# Altium PCB PCB1.PcbDoc
Units mil, origin at the board's own origin, x right, y up, seen from the top; angles counter-clockwise.
Board outline 2755 x 3780 mil, 2 copper layers (Top Layer, Bottom Layer); 103 components, 89 nets, 427 pads, 120 vias.
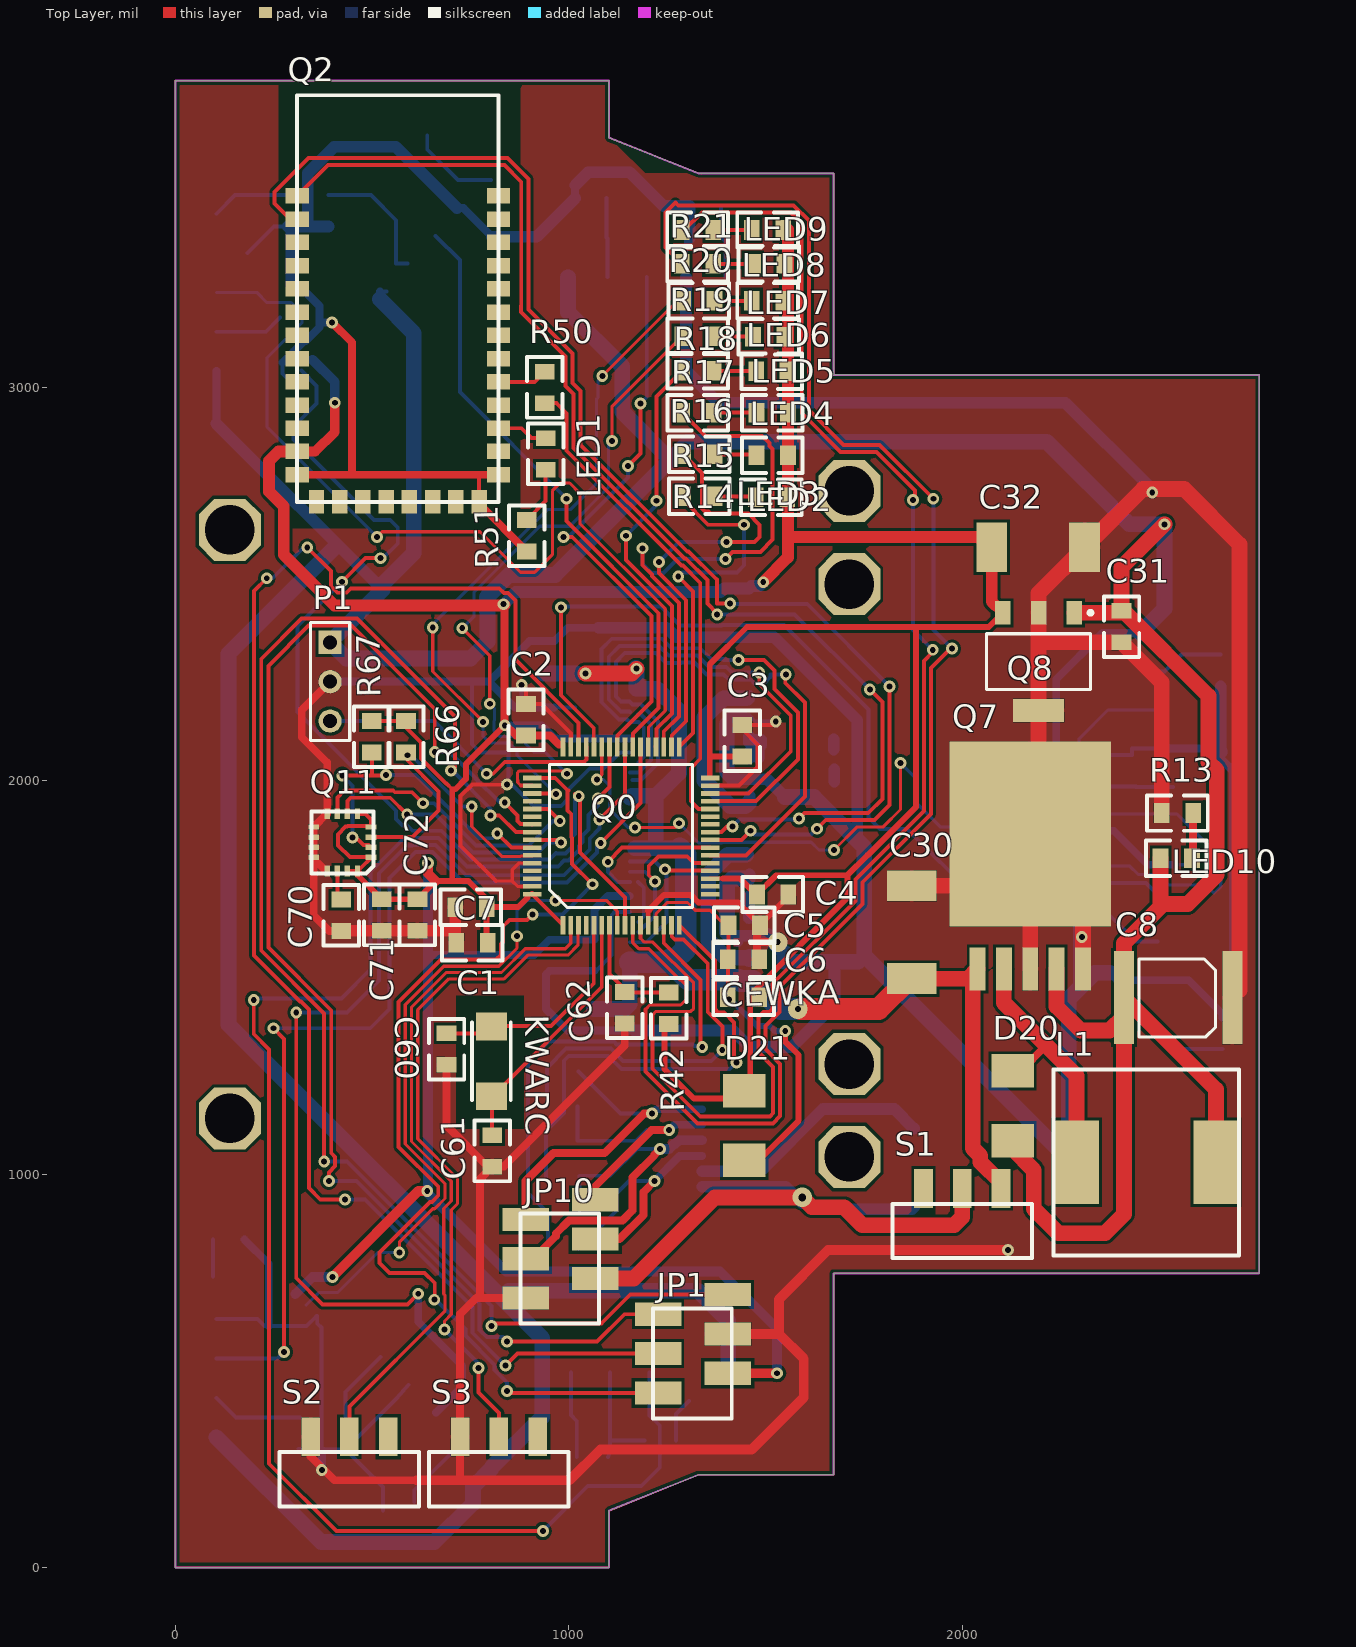
[diagram p0: Top Layer view]
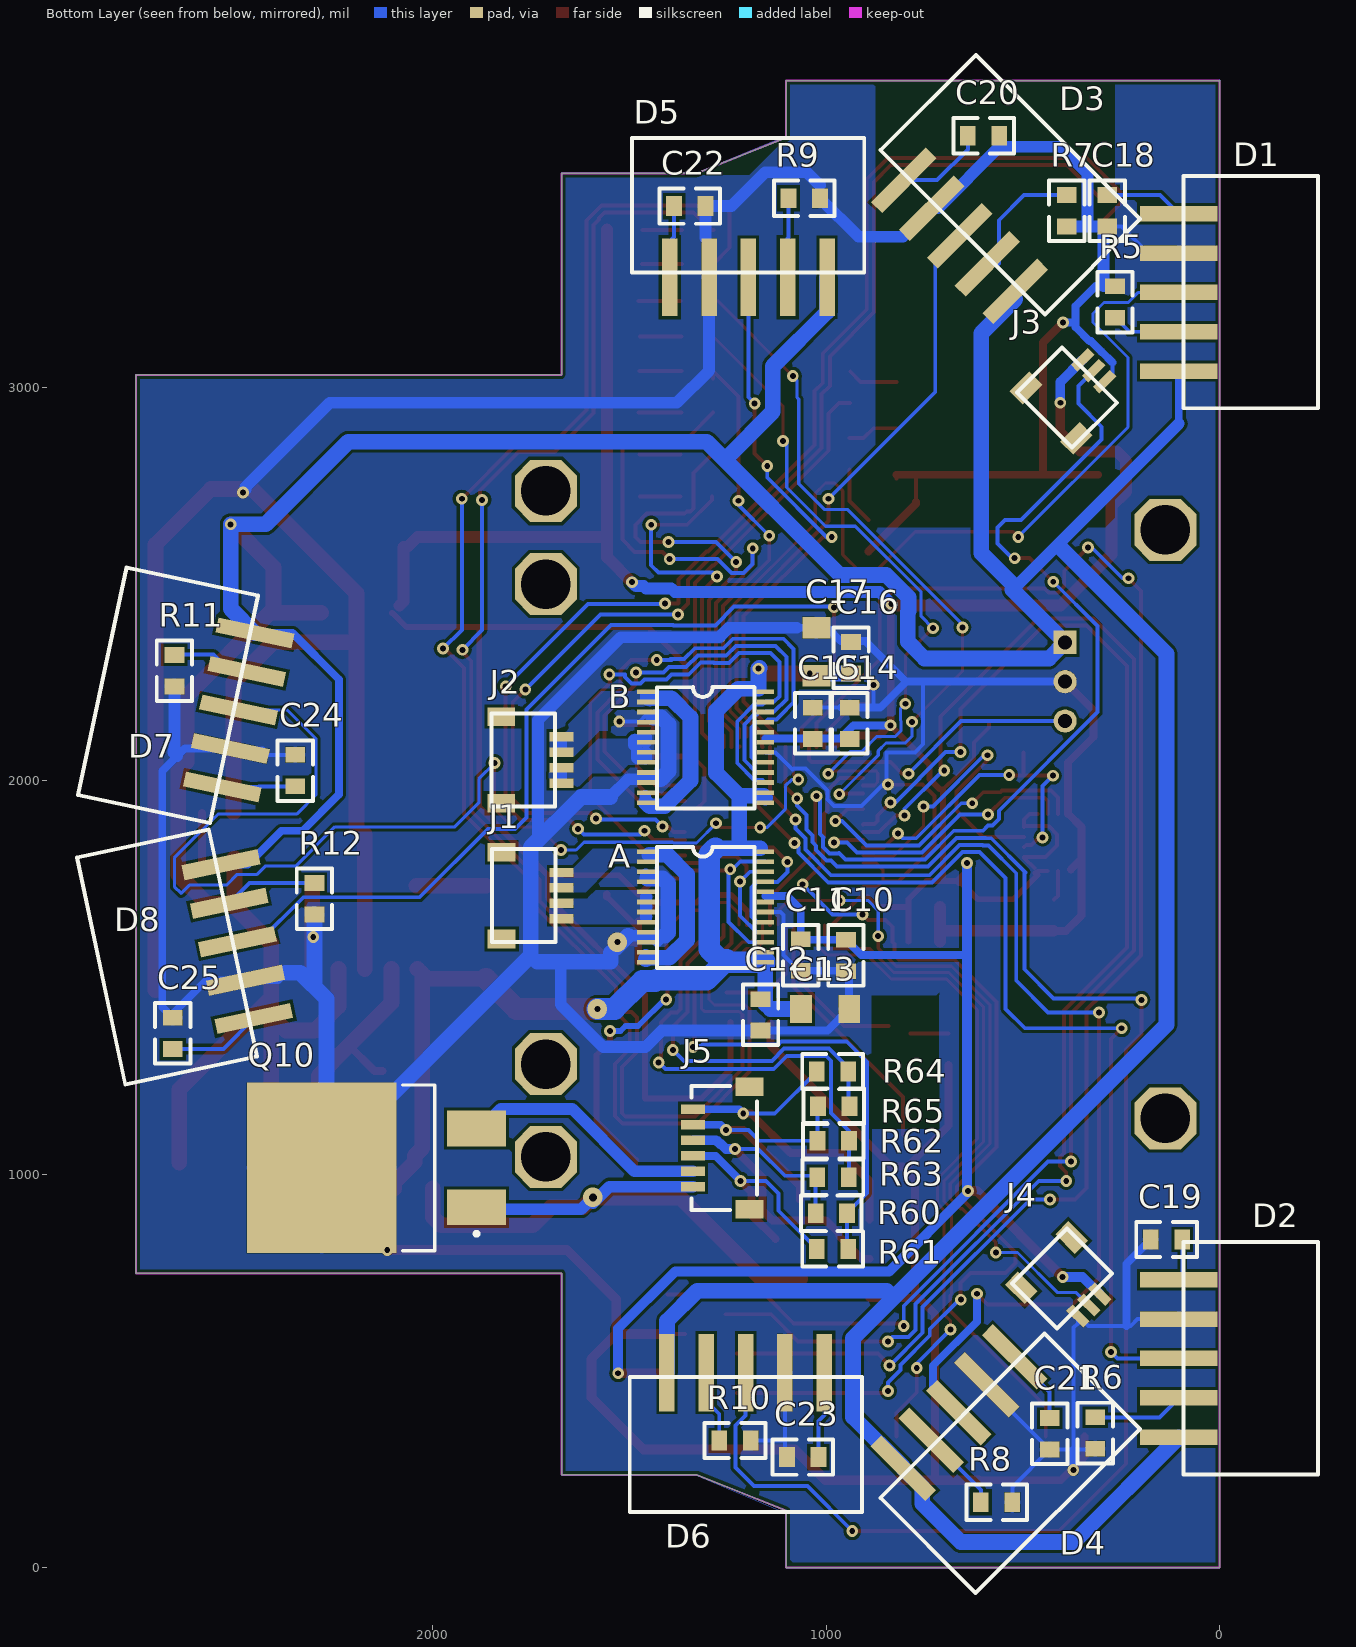
[diagram p1: Bottom Layer view, seen from below]
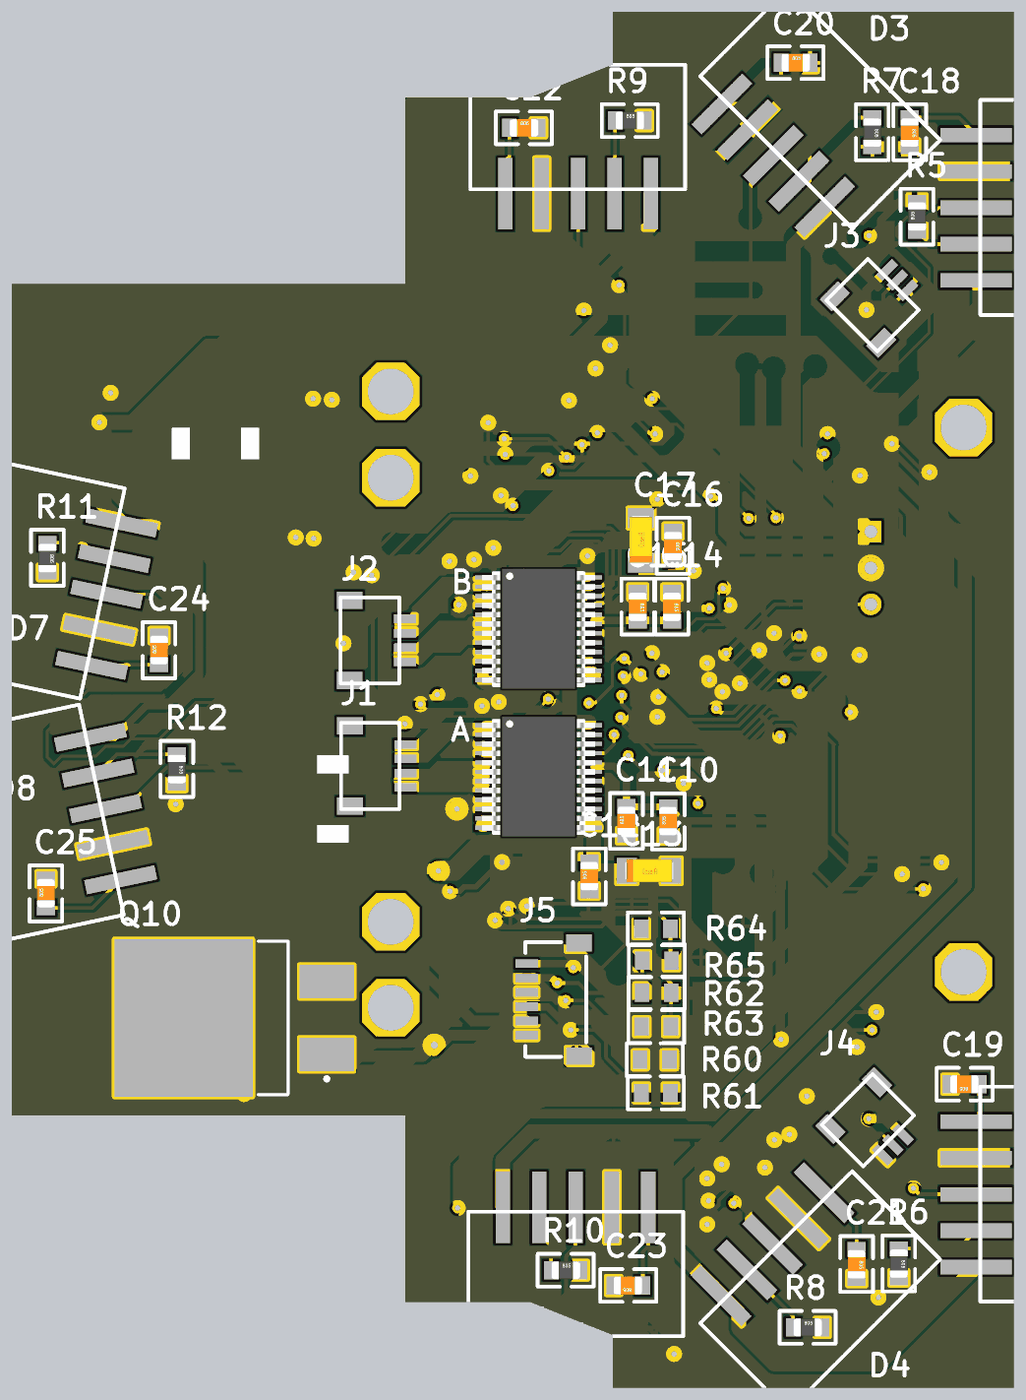
[diagram p2: 3D render of the assembled board from below, using the file's embedded part models]

## Layer stack, top to bottom
Top Layer: signal copper 1.4
Dielectric: dielectric 12.6, FR-4, Dk 4.8
Bottom Layer: signal copper 1.4

## Board outline
0,0 0,3780 1102,3780 1102,3635 1330,3544 1673,3544 1673,3032 2755,3032 2755,748 1673,748 1673,236 1330,236 1102,145 1102,0

## Design rules (kind name [scope] priority, off if disabled: settings)
Clearance Clearance_1 [All] p1: gap=8
Clearance [InNet('GND')] p2: gap=20
ComponentClearance [All] p1 off: gap=10 collisioncheckmode=3 verticalgap=10 showdistances=FALSE
PolygonConnect PolygonConnect_1 [InNet('5V')AND InNet('GND')] p1: connectstyle=Relief reliefconductorwidth=10 reliefentries=4 polygonreliefangle="90 Angle" airgapwidth=10
PolygonConnect [All vs (InNet('M_OUT1A') AND InNet('M_OUT1B') AND InNet('M_OUT2A') AND InNet('M_OUT2B'))] p2: connectstyle=Direct reliefconductorwidth=10 reliefentries=4 polygonreliefangle="90 Angle" airgapwidth=10
RoomDefinition Sheet1 [InComponentClass('Sheet1')] p1: confinementstyle=ConfineIn formatcopy=TRUE lockcomponents=FALSE outline -500,-281 4429,-281 4429,3984 -500,3984
RoutingVias [All] p1: holewidth=20 width=50 viastyle="Through Hole" minholewidth=28 minwidth=50 maxholewidth=30 maxwidth=70
SilkscreenOverComponentPads SilkToSolderMaskClearance [IsPad] p1: minsilkscreentomaskgap=10
SolderMaskExpansion [All] p1: expansion=7
Width [All] p1: maxlimit=70 minlimit=8 preferedwidth=10
26 further rules are at their usual default settings.

## Components (designator, comment, footprint, x,y, rotation, side; value= is the part's Value field where it differs from the comment)
A "TB6612" SSOP24 1458,1820 r180 bottom
B "TB6612" SSOP24 1458,2226 r180 bottom
C1 "100n" "0805 CAP" 794,1588 r90 top
C2 "100n" "0805 CAP" 891,2115 r0 top
C3 "100n" "0805 CAP" 1441,2062 r0 top
C4 "100n" "0805 CAP" 1478,1711 r270 top
C5 "100n" "0805 CAP" 1406,1633 r270 top
C6 "1u" "0805 CAP" 1484,1546 r90 top
C7 "10u" "0805 CAP" 791,1679 r90 top
C8 "1000u" F720J108MMC 2545,1449 r0 top
C10 "10u" "0805 CAP" 950,1596 r0 bottom
C11 "100n" "0805 CAP" 1065,1597 r0 bottom
C12 "100n" "0805 CAP" 1167,1445 r0 bottom
C13 "22u" TANTAL_A 1064,1420 r180 bottom
C14 "10u" "0805 CAP" 940,2106 r180 bottom
C15 "100n" "0805 CAP" 1034,2106 r180 bottom
C16 "100n" "0805 CAP" 937,2273 r180 bottom
C17 "22u" TANTAL_A 1025,2267 r90 bottom
C18 "100n" "0805 CAP" 286,3409 r180 bottom
C19 "100n" "0805 CAP" 175,834 r270 bottom
C20 "100n" "0805 CAP" 560,3640 r90 bottom
C21 "100n" "0805 CAP" 432,300 r180 bottom
C22 "100n" "0805 CAP" 1307,3461 r90 bottom
C23 "100n" "0805 CAP" 1100,281 r270 bottom
C24 "100n" "0805 CAP" 2350,2066 r0 bottom
C25 "100n" "0805 CAP" 2661,1398 r0 bottom
C30 "100u" TANTAL_C 1872,1497 r90 top
C31 "470n" "0805 CAP" 2405,2352 r0 top
C32 "33u" TANTAL_C 2075,2594 r0 top
C60 "18p" "0805 CAP" 689,1278 r0 top
C61 "18p" "0805 CAP" 805,1099 r180 top
C62 "100n" "0805 CAP" 1142,1463 r180 top
C70 "10n" 0805 421,1618 r0 top
C71 "10u" 0805 524,1699 r180 top
C72 "100n" 0805 615,1699 r180 top
CEWKA "10uH" 0805 1404,1450 r270 top
D1 "GP2Y" "gp2y smd" 92,3537.55 r270 bottom
D2 "GP2Y" "gp2y smd" 92,827.55 r270 bottom
D3 "GP2Y" "gp2y smd" 862,3603 r225 bottom
D4 "GP2Y" "gp2y smd" 445,595 r315 bottom
D5 "GP2Y" "gp2y smd" 1494,3292 r180 bottom
D6 "GP2Y" "gp2y smd" 909,484 r0 bottom
D7 "GP2Y" "gp2y smd" 2567,1893 r102 bottom
D8 "GP2Y" "gp2y smd" 2447,1299 r78 bottom
D20 "Schottky" SMB 2128,1164 r90 top
D21 "Schottky" SMB 1446,1114 r90 top
J1 "4PIN_1MM" CON_1mm_4pin 1771,1716 r270 bottom
J2 "4PIN_1MM" CON_1mm_4pin 1772,2061 r270 bottom
J3 "3PIN_1MM" CON_1MM_3PIN 376,2959 r225 bottom
J4 "3PIN_1MM" CON_1MM_3PIN 416,723 r315 bottom
J5 "6PIN_1MM" 6pin 1274,1047 r90 bottom
JP1 "HEADER 3X2" "MM3X2 SMD" 1404,494 r90 top
JP10 "HEADER 3X2" "MM3X2 SMD" 1067,735 r90 top
KWARC "16MHz" KWARC_16M 803,1277 r90 top
L1 "100uH" CEWKA 2881,1030 r90 top
LED1 "LED_0805" 0805 941,2791 r0 top
LED2 "LED_0805" 0805 1475,2721 r270 top
LED3 "LED_0805" 0805 1477,2828 r270 top
LED4 "LED_0805" 0805 1477,2936 r270 top
LED5 "LED_0805" 0805 1476,3041 r270 top
LED6 "LED_0805" 0805 1468,3129 r270 top
LED7 "LED_0805" 0805 1465,3220 r270 top
LED8 "LED_0805" 0805 1468,3314 r270 top
LED9 "LED_0805" 0805 1465,3400 r270 top
LED10 "LED_0805" 0805 2584,1803 r90 top
P1 "Header 3" HDR1X3 393,2352 r270 top
Q0 "STM32F303RCT6" STM32F303RCT6 1008,1736 r90 top
Q2 "HC-06" PCBComponent_1 575,3221 r0 top
Q7 "LM2576" LM2576 2039,1325 r0 top
Q8 "LM3940IMP" LM3940IMP 2194,2303 r270 top
Q10 "N-MOSFET" DPAK 2137,1016 r0 bottom
Q11 "GYRO_L3GD20" GYRO_L3GD20 438,1922 r180 top
R5 "1" "0805 RES" 266,3257 r0 bottom
R6 "1" "0805 RES" 316,302 r180 bottom
R7 "1" "0805 RES" 389,3409 r180 bottom
R8 "1" "0805 RES" 527,166 r90 bottom
R9 "1" "0805 RES" 1016,3481 r90 bottom
R10 "1" "0805 RES" 1192,323 r90 bottom
R11 "1" "0805 RES" 2657,2240 r180 bottom
R12 "1" "0805 RES" 2301,1660 r180 bottom
R13 "470" "0805 RES" 2507,1918 r270 top
R14 "680" "0805 RES" 1291,2723 r270 top
R15 "680" "0805 RES" 1291,2830 r270 top
R16 "680" "0805 RES" 1288,2936 r270 top
R17 "680" "0805 RES" 1288,3042 r270 top
R18 "680" "0805 RES" 1288,3130 r270 top
R19 "680" "0805 RES" 1290,3220 r270 top
R20 "680" "0805 RES" 1287,3314 r270 top
R21 "680" "0805 RES" 1287,3400 r270 top
R42 "10k" 0805 1254,1462 r180 top
R50 "470" "0805 RES" 939,2960 r0 top
R51 "470" "0805 RES" 893,2583 r0 top
R60 "680" 0805 947,901 r90 bottom
R61 "680" 0805 1024,810 r270 bottom
R62 "680" 0805 942,1085 r90 bottom
R63 "680" 0805 1023,992 r270 bottom
R64 "680" 0805 944,1261 r90 bottom
R65 "680" 0805 1021,1173 r270 bottom
R66 "10k" 0805 586,2152 r180 top
R67 "10k" 0805 499,2152 r180 top
S1 "Switch" Switch 2000,885 r180 top
S2 "Switch" Switch 442,254 r180 top
S3 "Switch" Switch 822,254 r180 top

## Footprints (in the part's own frame and the unit in brackets; to place one, negate y for a bottom-side part, rotate by r counter-clockwise, add the part's x,y. Pads: shape width x height; smd on the part's side, far side on the other; paste and mask are expansions set on the pad)
6pin [mm] "con_1mm_mm"
  rect 0.6x1.55 smd: 1(-2,1.65) 2(-1,1.65) 3(0,1.65) 4(1,1.65) 5(2,1.65) 6(3,1.65)
  rect 1.2x1.8 smd: NC(-3.45,-2) NC(4.45,-2)
  silkscreen extent -3.5,-2.5 4.5,1.75
0805 [mil]
  rect 50x40 smd: 1(0,0) 2(0,80)
  silkscreen extent -45,-37 45,117
"0805 CAP" [mil]
  rect 50x40 smd: 1(0,0) 2(0,80)
  silkscreen extent -45,-37 45,117, body extent -25,0 25,79, height 31
"0805 RES" [mil]
  rect 50x40 smd: 1(0,0) 2(0,80)
  silkscreen extent -45,-37 45,117, body extent -25,0 25,79, height 31
CEWKA [mm]
  rect 5.4x2.9 smd: 1(0,15) 2(0,6)
  silkscreen extent -6,4.5 6,16.5
CON_1MM_3PIN [mm]
  rect 0.6x1.55 smd: 1(-1.5,2.5) 2(-0.5,2.5) 3(0.5,2.5)
  rect 1.2x1.8 smd: NC(-2.8,-1.375) NC(1.8,-1.375)
  silkscreen extent -3,-2 2.03,2.1
CON_1mm_4pin [mm]
  rect 0.6x1.55 smd: 1(-1.3,2.5) 2(-0.3,2.5) 3(0.7,2.5) 4(1.7,2.5)
  rect 1.2x1.8 smd: NC(-2.6,-1.375) NC(3,-1.375)
  silkscreen extent -2.8,-2 3.2,2.1
DPAK [mm]
  rect 3.81x2.32 smd: 1(-6.3,2.54) 3(-6.3,-2.54)
  rect 9.65x11 smd: 4(3.7,0)
  silkscreen extent -6.42,-5.35 -1.53,5.35, body extent -3.6,-5.33 6.05,5.33, height 4.83
F720J108MMC [mm]
  rect 1.3x6 smd: 1(-3.404,0) 2(3.6,0)
  silkscreen extent -2.44,-2.54 2.51,2.5
"gp2y smd" [mm]
  rect 1x5 smd: 1(2.438,-0.3) 2(4.978,-0.3) 3(7.518,-0.3) 4(10.058,-0.3) 5(12.598,-0.3)
  silkscreen extent 0,0 15,8.7
GYRO_L3GD20 [mm]
  rect 0.7x0.35 smd: 1(-1.5,2.95) 2(-1.5,2.3) 3(-1.5,1.65) 4(-1.5,1) 9(2.2,1) 10(2.2,1.65) 11(2.2,2.3) 12(2.2,2.95)
  rect 0.35x0.7 smd: 5(-0.625,0.15) 6(0.025,0.15) 7(0.675,0.15) 8(1.325,0.15) 13(1.325,3.85) 14(0.675,3.85) 15(0.025,3.85) 16(-0.625,3.85)
  silkscreen extent -1.65,0 2.35,4
HDR1X3 [mm] "Connector; Header; 3 Position"
  rect 1.5x1.5 hole 0.9: 1(0,0)
  round 1.5 hole 0.9: 2(2.54,0) 3(5.08,0)
  silkscreen extent -1.27,-1.27 6.35,1.27
KWARC_16M [mm] "Kwarc_16MHz"
  rect 1.8x2 smd: 1(-2,0) 2(2.5,0)
  silkscreen extent -2.25,-1.25 2.75,1.25
LM2576 [mil]
  rect 40x110 smd: 1(0,196.85) 2(66.93,196.85) 3(133.86,196.85) 4(200.79,196.85) 5(267.72,196.85)
  rect 410x470 smd: 3(133.86,539.37)
LM3940IMP [mm] "LM3940IMIP"
  rect 1.5x1 smd: GND(-3.15,0) IN(-3.15,2.3) OUT(-3.15,-2.3)
  rect 1.5x3.3 smd: GND(3.15,0)
  silkscreen extent -3.27,-3.35 1.8,3.48, body extent -1.85,-3.35 1.86,3.35, height 1.6
"MM3X2 SMD" [mm]
  rect 1.5x3 smd: 1(0,0) 2(-1.27,4.5) 3(2.54,0) 4(1.27,4.5) 5(5.08,0) 6(3.81,4.5)
  silkscreen extent -2.92,-0.25 4.19,4.83, body extent -2.87,-1.16 6.68,5.74, height 5.2
PCBComponent_1 [mm]
  rect 1.5x1 smd: 3(-6.75,3.75) 3V3(-6.75,-9.75) 4(-6.75,2.25) 5(-6.75,0.75) 6(-6.75,-0.75) 7(-6.75,-2.25) 8(-6.75,-3.75) 9(-6.75,-5.25) 10(-6.75,-6.75) 11(-6.75,-8.25) 23(6.25,-9.75) 25(6.25,-6.75) 27(6.25,-3.75) 28(6.25,-2.25) 29(6.25,-0.75) 30(6.25,0.75) 31(6.25,2.25) 32(6.25,3.75) 33(6.25,5.25) 34(6.25,6.75) GND(-6.75,-11.25) GND(6.25,-11.25) KEY(6.25,-5.25) LED(6.25,-8.25) UART_RXD(-6.75,5.25) UART_TXD(-6.75,6.75)
  rect 1x1.5 smd: 14(-5.5,-13) 15(-4,-13) 16(-2.5,-13) 17(-1,-13) 18(0.5,-13) 19(2,-13) 20(3.5,-13) GND(5,-13)
  silkscreen extent -6.75,-13 6.25,13.25
SMB [mil]
  rect 85x107.99 smd: 1(-78.74,0) 2(98.43,0)
SSOP24 [mm]
  rect 1.143x0.3 smd: 1(0,0) 2(0,-0.65) 3(0,-1.3) 4(0,-1.95) 5(0,-2.6) 6(0,-3.25) 7(0,-3.9) 8(0,-4.55) 9(0,-5.2) 10(0,-5.85) 11(0,-6.5) 12(0,-7.15) 13(7.7,-7.15) 14(7.7,-6.5) 15(7.7,-5.85) 16(7.7,-5.2) 17(7.7,-4.55) 18(7.7,-3.9) 19(7.7,-3.25) 20(7.7,-2.6) 21(7.7,-1.95) 22(7.7,-1.3) 23(7.7,-0.65) 24(7.7,0)
  silkscreen extent 0.7,-7.52 7,0.3, body extent -0.1,-7.89 7.8,0.74, height 1.88
STM32F303RCT6 [mm]
  rect 0.3x1.2 smd: BOOT0(1.39,2.579) PA3(-0.61,-8.921) PA4(0.89,-8.921) PA5(1.39,-8.921) PA6(1.89,-8.921) PA7(2.39,-8.921) PA14(6.89,2.579) PA15(6.39,2.579) PB0(3.89,-8.921) PB1(4.39,-8.921) PB2(4.89,-8.921) PB3(3.89,2.579) PB4(3.39,2.579) PB5(2.89,2.579) PB6(2.39,2.579) PB7(1.89,2.579) PB8(0.89,2.579) PB9(0.39,2.579) PB10(5.39,-8.921) PB11(5.89,-8.921) PC4(2.89,-8.921) PC5(3.39,-8.921) PC10(5.89,2.579) PC11(5.39,2.579) PC12(4.89,2.579) PD2(4.39,2.579) PF4(-0.11,-8.921) VDD_1(-0.61,2.579) VDD_2(6.89,-8.921) VDD_4(0.39,-8.921) VSS_1(-0.11,2.579) VSS_2(6.39,-8.921)
  rect 1.2x0.3 smd: NRST(-2.61,-2.421) PA0(-2.61,-5.921) PA1(-2.61,-6.421) PA2(-2.61,-6.921) PA8(8.89,-2.921) PA9(8.89,-2.421) PA10(8.89,-1.921) PA11(8.89,-1.421) PA12(8.89,-0.921) PA13(8.89,-0.421) PB12(8.89,-6.921) PB13(8.89,-6.421) PB14(8.89,-5.921) PB15(8.89,-5.421) PC0(-2.61,-2.921) PC1(-2.61,-3.421) PC2(-2.61,-3.921) PC3(-2.61,-4.421) PC6(8.89,-4.921) PC7(8.89,-4.421) PC8(8.89,-3.921) PC9(8.89,-3.421) PC13(-2.61,0.079) PC14/OSC32_IN(-2.61,-0.421) PC15/OSC32_OUT(-2.61,-0.921) PF0/OSC_IN(-2.61,-1.421) PF1/OSC_OUT(-2.61,-1.921) VBAT(-2.61,0.579) VDD_3(8.89,0.579) VDDA(-2.61,-5.421) VSS_3(8.89,0.079) VSSA/VREF-(-2.61,-4.921)
  silkscreen extent -1.47,-7.79 7.76,1.44, body extent -1.57,-7.89 7.86,1.54, height 1.6
Switch [mm]
  rect 1.2x2.5 smd: 1(-2.5,-2) 2(0,-2) 3(2.5,-2)
  silkscreen extent -4.5,-1 4.5,2.5
TANTAL_A [mm]
  rect 1.4x1.8 smd: 1(0,0) 2(3.1,0)
  body extent -0.12,-0.79 3.27,0.81, height 2.05
TANTAL_C [mm]
  rect 2x3.2 smd: 1(0,0) 2(6,0)
  body extent -0.04,-1.6 6.14,1.6, height 2.22

## Part data
C1 C2 C3 C4 C5 C6 C7 C10 C11 C12 C14 C15 C16 C18 C19 C20 C21 C22 C23 C24 C25 C31 C60 C61 C62 C70 C71 C72: library part CAP, "Capacitor"
C8: "F720J108MMC"
C13 C17: library part E
C30 C32: library part ELECTRO2, "Electrolytic Capacitor"
CEWKA R5 R6 R7 R8 R9 R10 R11 R12 R13 R14 R15 R16 R17 R18 R19 R20 R21 R42 R50 R51 R60 R61 R62 R63 R64 R65 R66 R67: library part R
J1 J2: library part CON_1MM_4PIN
J3 J4: library part CON_1MM_3PIN
J5 JP1: library part CON_1MM_6PIN
KWARC: library part XTAL, "Crystal Oscillator"
L1: library part CEWKA
P1: "Header, 3-Pin"
Q2: library part Component_1, "Bluetooth"
Q10: library part n-mosfet

## Free pads (board coordinates)
  oct 157.48x157.48 hole 125.98: 1(138,1142) 1(138,2638) 1(1713,1044) 1(1713,1280) 1(1713,2500) 1(1713,2737)

## Via types
v1: diameter 30, hole 15, Top Layer to Bottom Layer, 117 vias
v2: diameter 50, hole 15, Top Layer to Bottom Layer, 2 vias
v3: diameter 50, hole 20, Top Layer to Bottom Layer, 1 vias

## Nets (pads, with @x,y where several pads share a name; then routed paths per layer and width w, separated by ;. In a path a pad name is that pad's centre, name@x,y a point inside that pad or via, vN(x,y) a via of type N, cw(c..) or ccw(c..) an arc to the next point about the centre after c; other vN are vias at no path point)
5V: C8.1 C31.2 D1.5 D2.5 D3.5 D4.5 D5.5 D6.5 D7.5 D8.5 D20.1 L1.2 LED10.2 P1.1 Q7.4 Q8.IN | length 14124.5
  Top Layer w40: D20.1 2128,1064 2182,1010 2182,912 2244,850 2363,850 2411,898 C8.1@2411,1402 ; Q7.4 2239.79,1426.21 2301,1365 2374,1365 C8.1@2411,1402 ; Q8.IN C31.2@2400.02,2427.02 ; LED10.2 2504,1680 2411,1587 C8.1 ; 2511,1687 2573,1687 2647,1761 2647,2027 2626,2048 2626,2215.6 2409.6,2432 C31.2 2405,2543 v1(2514,2652) ; L1.2 2644.78,1215.22 C8.1 ; C8.1@2411,1402 C8.1
  Bottom Layer w10: D3.5 D3.5@536.08,3243.92 ; D8.5 D8.5@2577.29,1786.62
  Bottom Layer w20: 103.81,2908.19 D1.5 ; D3.5@519.63,3224.37 D3.5 ; D7.5 2356.71,2375.71 2239,2258 2239,1965 2331,1873 2385,1873 2471.38,1786.62 D8.5
  Bottom Layer w30: 103.81,2908.19 526.5,2485.5
  Bottom Layer w40: D2.5 370.36,65 658,65 756,163 756,204.55 D4.5 804.08,255.08 932,383 932,583 135,1380 135,2323 400,2588 ; D3.5@519.63,3224.37 606,3138 606,2579 526.5,2499.5 ; 526.5,2485.5 P1.1 434,2311 750,2311 793.09,2354.09 793.09,2429.09 791,2431.19 791,2466.81 847.19,2523 965,2523 1304,2862 2215,2862 2425,2652 v1(2514,2652) 2514,2437.38 D7.5 ; 847,704 1328,704 1405,627 D6.5 ; D5.5 998,3192 1136,3054 1136,2938 1252,2822
BAT1: J5.3 JP10.3 R61.1 | length 623.9
  Top Layer w20: 1128.6,835 1190,896.4 1190,955 v1(1218,983)
  Bottom Layer w10: R61.1 1121,907 1121,951 1153,983 v1(1218,983)
  Bottom Layer w20: v1(1218,983) 1281,1046 1337.96,1046 J5.3
BAT1_ADC: Q0.PA0 R60.1 R61.2 | length 1316.8
  Top Layer w8: Q0.PA0@1239.33,1631.47 Q0.PA0
  Top Layer w10: Q0.PA0 1241.11,1587.89 1335,1494 1335,1327 v1(1339,1323)
  Bottom Layer w10: R61.2@947,813 R60.1 896,952 896,1285 948,1337 1114.46,1337 1121.46,1330 1315,1330 1319,1326 1336,1326 v1(1339,1323)
BAT2: J5.4 JP10.4 R60.2 R63.1 | length 956.5
  Top Layer w20: JP10.4 909.76,785 966.89,842.13 966.89,848.93 1000.49,882.53 1136.53,882.53 1162,908 1162,992.35 1218,1048.35 1218,1050 v1(1232,1064)
  Bottom Layer w10: R60.2 1027,996 1105,996 1173,1064 v1(1232,1064)
  Bottom Layer w25: v1(1232,1064) 1255,1064 1267.5,1076.5 1269.7,1076.5 1279.57,1086.37 J5.4
BAT2_ADC: Q0.PA2 R62.1 R63.2 | length 1197.3
  Top Layer w10: Q0.PA2 1371,1542.72 1371,1419.62 1379.62,1411 1395,1411 1420,1386 1420,1290 v1(1426,1284)
  Bottom Layer w10: R63.2@942,993 R62.1 942,1110 988,1156 988,1288.38 1000.62,1301 1099.54,1301 1133.54,1267 1409,1267 v1(1426,1284)
BAT3: J5.5 JP10.5 R62.2 R65.1 | length 702.1
  Top Layer w20: JP10.5 1067,969 1210,1112 v1(1255,1112)
  Bottom Layer w10: R65.1@1022,1172 R62.2 1171,1085 1198,1112 v1(1255,1112)
  Bottom Layer w20: v1(1255,1112) 1268.74,1125.74 J5.5
BAT3_ADC: Q0.PA1 R64.1 R65.2 | length 968.6
  Top Layer w10: Q0.PA1 1261.57,1632.47 1261.57,1604.24 1269.19,1596.62 1291.65,1596.62 1353,1535.27 1353,1412.16 1390,1375.16 v1(1390,1316)
  Bottom Layer w10: R65.2@944,1176 R64.1 944,1269.84 993.16,1319 1107,1319 1138,1288 1362,1288 v1(1390,1316)
BAT4: J5.6 JP10.6 R64.2 | length 853.8
  Top Layer w20: JP10.6 889.83,982.83 961,1054 1091,1054 1191,1154 v1(1211,1154)
  Bottom Layer w10: R64.2 1131,1154 v1(1211,1154) 1222.11,1165.11
  Bottom Layer w20: 1222.11,1165.11 J5.6
GND: A.3 A.4 A.9 A.10 A.18 B.3 B.4 B.9 B.10 B.18 C1.2 C2.2 C3.2 C4.2 C5.2 C6.1 C7.2 C8.2 C10.2 C11.2 C12.2 C13.2 C14.2 C15.2 C16.2 C17.2 C18.1 C19.1 C20.1 C21.1 C22.1 C23.1 C24.1 C25.1 C30.2 C31.1 C32.2 C60.1 C61.2 C62.2 C70.1 C71.2 C72.2 D1.2 D2.2 D3.2 D4.2 D5.2 D6.2 D7.2 D8.2 J3.3 J4.3 JP1.3 JP10.2 P1.2 Q0.BOOT0 Q0.VSS_1 Q0.VSS_2 Q0.VSS_3 Q0.VSSA/VREF- Q2.GND Q7.3 Q7.5 Q8.GND Q10.4 Q11.8 Q11.9 Q11.10 Q11.11 Q11.12 Q11.13 R5.1 R6.1 R7.1 R8.1 R9.1 R10.1 R11.1 R12.1 R13.1 R51.1 S2.3 S3.3 | length 26686.9
  Top Layer w8: 815,1745 856,1745 ; Q0.VSS_1 869.33,1731.67 856,1745 ; Q0.BOOT0 872.72,1790.72 856,1774 856,1745
  Top Layer w10: Q2.GND@771.85,2709.19 771.85,2774.24 ; 815,1745 725,1835 725,1961 755,1991 778.4,1991 779.4,1990 842,1990 v1(843,1991) ; Q2.GND@821.06,2768.21 Q2.GND@821.06,2778.09 ; v1(880,2244) 891,2233 C2.2 930,2195 1004.89,2120.11 Q0.VSS_3 Q0.VSS_3@1005.67,2085.22 ; Q0.VSSA/VREF-@1201.64,1633.34 1201.64,1669.64 ; Q0.VSS_2@1358.44,1988.35 Q0.VSS_2 1432.57,1987.57 1481,2036 1481,2091 1441,2131 C3.2 1517,2142 v1(1526,2151) ; JP1.3@1359,594 JP1.3 ; C8.2@2686.73,1446 C8.2 C8.2@2702,1464.27
  Top Layer w15: 1201.64,1669.64 1242,1710 1309.76,1710 1329.18,1690.58 1429.42,1690.58 C5.2@1478,1642 ; C5.2@1478,1626 C4.2@1558,1706
  Top Layer w20: Q2.GND@309.25,2778.09 449,2778.09 ; S2.3 343.57,282.43 404,222 612.83,222 ; 378,1775 Q11.12@351.39,1801.61 ; P1.2 321,2180 321,2111 385.83,2046.17 Q11.8 384.85,1916.09 Q11.9 Q11.10 Q11.11 Q11.12 Q11.12@351.39,1801.61 ; v1(398,3165) 449,3114 449,2778.09 ; C70.1 391,1618 351.39,1657.61 Q11.12@351.39,1801.61 ; C60.1 689,1124 794,1019 C61.2 774,988 774,693 766,685 JP10.2 ; 723,235 723.57,235.57 S3.3 723.57,644.57 765,686 ; Q2.GND@771.85,2709.19 771.85,2704.15 R51.1 ; C61.2@806,1020 835,1020 1142,1327 C62.2 ; Q2.GND@821.06,2778.09 449,2778.09 ; C6.1@1478,1540 1478,1590 ; C5.2@1478,1642 1478,1590 ; v2(1531,1590) 1478,1590 ; C4.2@1558,1706 C4.2
  Top Layer w25: 612.83,222 1002,222 1080,300 1465,300 1597,432 1597,531 1534,594 ; JP1.3 1534,594 ; v1(2116,807) 1659,807 1534,682 1534,594
  Top Layer w30: C70.1@422,1619 C71.2 C72.2 703,1619 ; C1.2@711,1591 C7.2
  Top Layer w40: C30.2@1865,1733.22 Q7.3@2041.71,1733.22 ; Q7.3@2172.86,1521.85 Q7.3@2172.86,1864.37 ; Q7.3@2194,1885.51 2194,2178.98 2194,2350 ; Q7.5 Q7.3@2306.72,1730.51 ; R13.1@2507,1920 2507,2250 C31.1 2196,2352 2194,2350 ; C8.2@2705,1467.27 2705,2601 2564,2742 2459.22,2742 C32.2 2194,2476.78 2194,2427.02 2194,2350
  Bottom Layer w10: D2.2 208.45,631.55 226,614 237,614 333.52,614 359,639.48 J4.3 360.32,620.68 371,610 371,300 ; D1.2@182.55,3341.55 250,3409 C18.1 ; 272.4,3063.2 272.4,3034.77 J3.3 ; R6.1 312,302 314,300 371,300 ; R8.1@527,145 R8.1 527,205 C21.1 ; D4.2 562,430 C21.1 ; 754,2252 754,2093 774.54,2072.46 847,2072.46 ; v1(843,1991) 847,1995 847,2072.46 ; 880,2188 v1(880,2244) ; C14.2@962,2186 1015,2186 C15.2@1016,2187 ; C11.2@1069,1517 1109,1557 1109,1659 1116.46,1666.46 A.18 ; C23.1 1105,299 D6.2 ; 1108,323 R10.1 ; B.18 1129.46,2072.46 1085.3,2028.3 1082.6,2031 1053,2031 997,1975 997,1952.4 980.6,1936 910,1936 847,1999 847,2072.46 ; D5.2 1298,3371 1307,3380 ; 1458,2166.82 1473.82,2151 v1(1526,2151) ; C24.1 2432,2066 2432,2082.26 D7.2 ; 371,300 C21.1
  Bottom Layer w20: C19.1 237,772 237,614 ; 272.4,3063.2 299.64,3090.44 300.24,3090.44 300.24,3091.04 327.48,3118.28 331.28,3118.28 366,3153 366,3165 ; C18.1 C18.1@295,3400 ; 295,3258 315,3258 366,3207 366,3165 ; v1(372,248) 372,299 ; P1.2 754,2252 797,2252 ; v1(398,3165) 366,3165 ; D3.2@715.94,3456.06 D3.2 804.81,3383 ; C14.2@962,2186 863,2186 797,2252 ; R9.1 1016,3514 ; C11.2 951,1517 C10.2 941.95,1507.95 C13.2 996.95,1365 C12.2 ; 1075,2389.05 997.05,2389.05 963,2355 900,2355 797,2252 ; 2375,1512 2393.83,1493.17 D8.2 2575.83,1493.17 2661,1408 C25.1 2688,1425 2688,2025 2650,2063 2630.74,2082.26 D7.2
  Bottom Layer w30: C18.1 336,3409 ; 295,3258 C18.1@295,3400 ; R7.1 336,3409 ; D3.2@715.94,3456.06 560,3612 403,3612 336,3545 336,3409 ; 804.81,3383 918,3383 R9.1 ; 1016,3514 1049,3547 1155,3547 1241,3461 C22.1 1307,3380 ; 1075,2389.05 1248.35,2389.05 1272.4,2365 1522,2365 1733,2154 1733,1849 1751,1831 ; C12.2 1418,1365 1460,1323 1567,1323 1675,1431 1675,1540 ; D5.2 1298,3043 1380,2961 2262,2961 2476,2747 v1@2476,2740 ; 1411,1606 1416,1606 ; 1421,2004 1504,2004 1549,1959 ; 1429,1593 1416,1606 ; A.4@1454.32,1746.54 1459,1751.23 1459,1761.82 ; 1504,1606 1416,1606 ; Q10.4@2270.67,1016 Q10.4@2270.67,1036.33 ; 2650,2063 2659,2072 2659,2076 2657,2078 R11.1
  Bottom Layer w40: 1411,1606 1402,1615 1402,1738 1415.54,1751.54 1454.32,1751.54 ; 1421,2004 1401,2024 1401,2143 1419.82,2161.82 1437.18,2161.82 1439,2160 ; 1504,1606 v2@1534,1576 ; 1548,1562 1548,1540 1675,1540 1735,1540 ; 1549,1959 1623,1959 1751,1831 1751,1556 Q10.4@2270.67,1036.33 ; Q10.4@2270.67,1016 2270.67,1445.67 2337,1512 2375,1512 ; 2301,1480 R12.1
  other v1: 2304,1603 2483,2733
GYRO_DRDY: Q0.PB5 Q11.6 | length 723.5
  Top Layer w10: Q11.6 437.02,1949.02 445,1957 546,1957 v1(589,1914) ; Q0.PB5 907.24,1849 974,1849 v1(980,1843)
  Bottom Layer w10: v1(589,1914) 660.42,1914 756.42,1818 922,1818 947,1843 v1(980,1843)
GYRO_INT1: Q0.PC12 Q11.7 | length 780.6
  Top Layer w10: Q11.7 411.43,1957.43 429,1975 553.46,1975 557.46,1971 601,1971 v1(629,1943) ; Q0.PC12 946.48,1928.52 v1(977,1898)
  Bottom Layer w10: v1(629,1943) 656.88,1943 763.88,1836 898,1836 960,1898 v1(977,1898)
IN1A: A.17 A.21 Q0.PA7 | length 481.3
  Top Layer w10: v1(1099,1794) 1135.09,1830.09 Q0.PA7
  Bottom Layer w10: v1(1099,1794) 1099,1768 1123.77,1743.23 A.21 ; A.21@1176.05,1743.23 1190.35,1728.93 1190.35,1654.82 A.17@1176.4,1640.87
IN1B: B.17 B.21 Q0.PB10 | length 1368.8
  Top Layer w10: Q0.PB10 1476.2,1948.2 1582,2054 1582,2174 1523,2233 1523,2280 1496,2307 v1(1431,2307)
  Bottom Layer w10: B.17@1176.87,2046.87 1190.35,2060.35 1190.35,2135.65 1176.77,2149.23 B.21 1148.16,2155.91 1126.97,2155.91 1119.35,2163.53 1119.35,2163.66 1083.35,2199.66 1083.35,2335.35 1109.05,2361.05 1236.76,2361.05 1260.8,2337 1334,2337 1361.9,2309.1 1395.52,2309.1 1393.42,2307 v1(1431,2307)
IN2A: A.16 A.22 Q0.PA5 | length 439.9
  Top Layer w10: v1(1219,1743.7) 1219,1744 1203,1760 1203,1783 1228,1808 1301,1808 1318.28,1790.72 Q0.PA5
  Bottom Layer w10: A.22 1193.88,1768.82 v1(1219,1743.7) 1219,1657 A.16@1177.28,1615.28
IN2B: B.16 B.22 Q0.PB11 | length 1280.4
  Top Layer w10: Q0.PB11 1456.89,1967.89 1564,2075 1564,2166.54 1484,2246.54 v1(1484,2275)
  Bottom Layer w10: B.16 1177.28,2021.28 1208.35,2052.35 1208.35,2143.11 1183.32,2168.13 1176,2168.13 ; B.22 1153.94,2175.73 1132.74,2175.73 1101.35,2207.12 1101.35,2315.35 1129.05,2343.05 1229.3,2343.05 1254.35,2318 1277.66,2318 1278.66,2319 1326.54,2319 1356.54,2289 1400,2289 1414,2275 v1(1484,2275)
JTCK: JP1.2 Q0.PA14 | length 2679.3
  Top Layer w10: v1@659,684 659,723 633,749 544,749 519,774 519,801 647,929 651.6,929 668,945.4 668,968.6 567,1069.6 567,1438 674.62,1545.62 815,1545.62 827,1557.62 827,1585 832,1590 832,1629 849,1646 894,1646 v1(908,1660) ; v1(843,449) 848,444 JP1.2 ; Q0.PA14 965.34,2007.26 997.14,1975.46 999,1975.46 997,1973.46 997,1925 1006,1916 1006,1856.6 1008,1854.6 1008,1789 v1(1060,1737)
  Bottom Layer w10: v1@670,673 737,606 737,589.49 811,515.49 811,502.4 843,470.4 v1(843,449) ; v1(908,1660) 984,1660 1024,1700 1024,1701 v1(1060,1737)
  other v1: 658,681
JTMS: JP1.4 Q0.PA13 | length 3940.7
  Top Layer w10: v1(232,2515) 200,2483 200,1556 317,1439 318.6,1439 339,1418.6 339,965 368,936 v1(431,936) ; v1(335,2593) 395,2533 395,2494.4 411.4,2478 434.6,2478 445.6,2489 823,2489 835,2477 845.6,2477 864,2458.6 864,2308 1024.58,2147.42 Q0.PA13 ; v1(839,514) 869,544 JP1.4
  Bottom Layer w10: v1(232,2515) 247,2515 v1@334,2602 ; v1(431,936) 481.42,936 755,662.42 755,596.95 837.95,514 v1(839,514)
KEY: Q0.PB2 R50.1 | length 1261.9
  Top Layer w10: R50.1 968,2960 994,2934 994,2839 1286,2547 1289.6,2547 1334,2502.6 1334,2056 1310,2032 1310,1948 1329.48,1928.52 Q0.PB2
KTIR1: J3.2 Q0.PC1 | length 2579.7
  Top Layer w10: v1(423,2506) 483,2566 v1(521,2566) ; v1@1016,1967 1028,1955 1028,1818 1142.69,1703.31 Q0.PC1
  Bottom Layer w10: J3.2 358.84,3004 358.84,2958.84 300,2900 300,2868 505,2663 546,2663 565,2644 565,2603 528,2566 v1(521,2566) ; v1(423,2506) 310,2393 310,2174.86 561,1923.86 561,1902.4 577.4,1886 589,1886 602,1873 675.97,1873 748.97,1800 951,1800 967.2,1816.2 968.4,1815 991.6,1815 1008,1831.4 1008,1854.6 1006.8,1855.8 1016,1865 v1@1016,1967
  other v1: 1025,1961
KTIR2: J4.2 Q0.PC0 | length 1765.5
  Top Layer w8: v1(569,801) 569,826.96 654.04,912 658.64,912 685,938.36 685,975.64 584,1076.64 584,1430.96 681.66,1528.62 822.04,1528.62 868,1574.57 v1(868,1605) ; v1(966,1696) 1095,1696 1123,1668 Q0.PC0
  Bottom Layer w8: J4.2 364.16,699 412,699 514,801 v1(569,801) ; v1(868,1605) 868,1670 894,1696 v1(966,1696)
LED1: Q0.PB12 R14.1 | length 934.5
  Top Layer w10: v1(1278,2519) 1316,2481 1316,2121.52 Q0.PB12 ; R14.1 1291,2714.16 1354.16,2651 v1(1445,2651)
  Bottom Layer w10: v1(1278,2519) 1289,2530 1427,2530 1445,2548 v1(1445,2651)
LED2: Q0.PB13 R15.1 | length 1148.4
  Top Layer w10: v1(1229,2556) 1229,2527.95 1298,2458.95 1298,2151.43 1261.57,2115.01 1261.57,2086.78 Q0.PB13 ; R15.1 1338,2783 1338,2692.62 1345.62,2685 1354.46,2685 1360.46,2679 1456.6,2679 1485,2650.6 1485,2620 1472,2607 v1(1401,2607)
  Bottom Layer w10: v1(1229,2556) 1280,2607 v1(1401,2607)
LED3: Q0.PB14 R16.1 | length 1478.2
  Top Layer w10: v1(1187,2591) 1187,2548 1211,2524 1211,2520.5 1280,2451.5 1280,2164 1241.11,2125.11 Q0.PB14 ; R16.1 1347,2877 1491.38,2877 1510,2858.38 1510,2851 1518,2843 1518,2613 1487,2582 1416,2582 v1(1398,2564)
  Bottom Layer w10: v1(1187,2591) 1187,2551 1210,2528 1240.6,2528 1276.6,2564 v1(1398,2564)
LED4: Q0.PB15 R17.1 | length 1077.3
  Top Layer w10: v1(1145,2623) 1145,2561.04 1262,2444.04 1262,2171.46 1222.2,2131.66 1222.2,2110 ; Q0.PB15@1220.65,2086.78 Q0.PB15 ; v1(1223,2712) 1223,2977 R17.1 R17.1@1288,3022
  Bottom Layer w10: v1(1145,2623) 1223,2701 v1(1223,2712)
LED5: Q0.PA15 R18.1 | length 1745.4
  Top Layer w8: v1(729,2388) 799,2318 v1(799,2196) ; 878.24,1987.57 870,1995.81 870,2002.18 869,2003.18 869,2020 874.17,2025.17 v1@995,2025.17 ; v1(1110,2864) 1110,2952 R18.1
  Top Layer w10: 878.24,1987.57 Q0.PA15
  Bottom Layer w8: v1(729,2388) 759,2418 759,2480.07 925.93,2647 1001.96,2647 1100.48,2745.52 1100.48,2866.52 1103,2864 v1(1110,2864) ; v1(799,2196) 811,2184 811,2153.18 810,2152.18 810,2127 824,2113 871.03,2113 910.03,2074 939,2074 v1(995,2018)
LED6: Q0.PC10 R19.1 | length 1763.1
  Top Layer w8: v1(654,2390) 654,2278 v1(782,2150) ; v1(1085,3029) R19.1@1276,3220
  Top Layer w10: Q0.PC10 957.89,1967.89 v1@961,1971
  Bottom Layer w8: v1(654,2390) 654,2397.69 946.31,2690 1005.18,2690 1070,2754.82 1070,2970 1074,2974 1074,3018 v1(1085,3029) ; v1(782,2150) 782,2113 799,2096 848,2096 868,2076 868,2065 v1@969,1964
  other v1: 967,1966
LED7: Q0.PC2 R20.1 | length 4173.4
  Top Layer w8: Q0.PC2 1162.37,1588.63 1178,1573 1203,1573 1282,1494 1283.97,1494 1298,1479.97 1298,1444.03 1283.97,1430 1206,1430 1195,1419
  Top Layer w10: 1195,1419 1195,1260.55 1326.55,1129 1518.46,1129 1537,1147.54 1537,1280.46 1499.5,1317.96 1499.5,1376.66 1535,1412.16 1535,1475.55 1746.5,1687.05 1746.5,1742.04 1920.5,1916.04 1920.5,2286.5 1970,2336 v1(1974,2336) ; R20.1 1246,3355 1246,3445 1271,3470 1278,3463 1570.84,3463 1610,3423.84 1610,2942.46 1698.46,2854 1789.46,2854 v1(1926.46,2717)
  Bottom Layer w10: v1(1926.46,2717) 1926.46,2383.54 v1(1974,2336)
LED8: Q0.PC3 R21.1 | length 3877.9
  Top Layer w8: 1182.06,1599.94 1192,1590 1213.54,1590 1317,1486.54 1317,1421 1310,1414 1221.62,1414 1213,1405.38
  Top Layer w10: 1182.06,1599.94 Q0.PC3 ; 1213,1405.38 1213,1268.01 1334.01,1147 1511,1147 1519,1155 1519,1273 1481.5,1310.5 1481.5,1398.5 1495,1412 1509.38,1412 1517,1419.62 1517,1483.01 1728.5,1694.51 1728.5,1749.5 1902.5,1923.5 1902.5,2304.5 1925,2327 v1(1925,2333) ; R21.1 1293,3400 1338,3445 1563.38,3445 1578,3430.38 1578,3427 1592,3413 1592,2935 1691,2836 1782,2836 1880,2738 v1@1880,2722
  Bottom Layer w10: v1(1875,2714) 1875,2383 v1(1925,2333)
M_OUT1A: A.1 A.2 A.11 A.12 J1.1 J1.2 | length 432
  Bottom Layer w10: 1450,1812 1459,1803
  Bottom Layer w30: 1459,1546.5 1459,1557
  Bottom Layer w40: 1450,1812 1404,1812 1354,1762 1354,1595 1399,1550 1454.9,1550 1458.4,1546.5 1459,1546.5
M_OUT1B: B.1 B.2 B.11 B.12 J2.1 J2.2 | length 471.9
  Bottom Layer w30: 1458,2209 1458,2216 ; 1460,1954 1460,1962 ; J2.2@1673.57,2079.81 J2.1@1673.57,2105.43
  Bottom Layer w40: 1451.82,2209.82 1393.82,2209.82 1345,2161 1345,2001 1411,1935 1448.5,1935 B.12
M_OUT2A: A.5 A.6 A.7 A.8 J1.3 J1.4 | length 55
  Bottom Layer w30: 1458,1651 A.7 A.6 1458,1706
M_OUT2B: B.5 B.6 B.7 B.8 J2.3 J2.4 | length 143.4
  Bottom Layer w30: 1458,2057 B.7 ; 1458,2113 B.6 1464.39,2104.43 1488.68,2104.43 1488.68,2090.68 1482,2084 1482,2058 ; J2.4@1674.57,1998 J2.3@1674.57,2028.44
NetC5_1: C5.1 C6.2 CEWKA.1 D21.1 Q0.VDDA | length 1017.3
  Top Layer w8: Q0.VDDA 1221.43,1661.85 1250.08,1690.5 1301.68,1690.5 1321.1,1671.08 1358.92,1671.08 1397,1633 C5.1@1397,1625
  Top Layer w10: C6.2@1397,1540 C6.2@1398,1540 ; C5.1@1397,1625 C5.1@1398,1626 ; CEWKA.1 C6.2 ; C6.2@1406,1548 C5.1 ; D21.1@1484,1015.26 D21.1@1484,1036
  Top Layer w15: D21.1@1484,1036 1584,1136 1584,1303 1550,1337 v1(1550,1364)
  Bottom Layer w15: v1(1407,1444) 1407,1448 1478.5,1376.5 1510.5,1376.5 1523,1364 v1(1550,1364)
NetC18_2: C18.2 D1.1 | length 201.8
  Bottom Layer w10: D1.1 151.26,3489 C18.2
NetC19_2: C19.2 D2.1 | length 93.6
  Bottom Layer w10: D2.1@95,740.36 C19.2
NetC20_2: C20.2 D3.1 | length 229.9
  Bottom Layer w10: C20.2 640,3605 718.23,3526.77 D3.1
NetC21_2: C21.2 D4.1 | length 192.4
  Bottom Layer w10: C21.2 432,446.24 D4.1
NetC22_2: C22.2 D5.1 | length 185.4
  Bottom Layer w10: C22.2 1387,3382 1398,3371 D5.1
NetC23_2: C23.2 D6.1 | length 221
  Bottom Layer w10: D6.1 1005,388 1020,373 C23.2
NetC24_2: C24.2 D7.1 | length 187
  Bottom Layer w10: C24.2 2442,1986 2442,1984.45 D7.1
NetC25_2: C25.2 D8.1 | length 237.6
  Bottom Layer w10: D8.1 2532.76,1318 C25.2
NetC60_2: C60.2 KWARC.2 Q0.PF0/OSC_IN | length 512.1
  Top Layer w10: C60.2 KWARC.2@785.57,1358 ; KWARC.2@841.1,1376.43 954.43,1376.43 1063.17,1485.17 1063.17,1632.46 Q0.PF0/OSC_IN
NetC61_1: C61.1 KWARC.1 Q0.PF1/OSC_OUT | length 645.8
  Top Layer w10: C61.1 KWARC.1@805,1196.26 ; KWARC.1@807,1199.26 1083.63,1475.89 Q0.PF1/OSC_OUT
NetC70_2: C70.2 Q11.14 | length 76.4
  Top Layer w10: Q11.14 411.43,1707.57 C70.2
NetD1_2: D1.4 R5.2 | length 177.3
  Bottom Layer w10: D1.4 229.55,3141.55 R5.2@266,3178
NetD2_2: D2.4 R6.2 | length 232.7
  Bottom Layer w10: D2.4 153.36,382 R6.2
NetD3_2: D3.4 R7.2 | length 338.2
  Bottom Layer w10: R7.2 497,3489 561,3425 561,3314.63 D3.4
NetD4_2: D4.4 R8.2 | length 209.7
  Bottom Layer w10: R8.2 607,196.97 D4.4
NetD5_2: D5.4 R9.2 | length 201.6
  Bottom Layer w10: R9.2 1096,3381 1098,3379 D5.4
NetD6_2: D6.4 R10.2 | length 113.7
  Bottom Layer w10: R10.2 1272,390 D6.4@1305,423
NetD7_2: D7.4 R11.2 | length 200.7
  Bottom Layer w10: D7.4 2513.89,2277.89 2557,2321 R11.2@2656,2321
NetD8_2: D8.4 R12.2 | length 238
  Bottom Layer w10: R12.2 2466.58,1740 D8.4
NetD20_2: D20.2 L1.1 Q7.2 | length 681.2
  Top Layer w20: D20.2 2148.43,1262.43 2213.5,1327.5
  Top Layer w40: Q7.2 2105.43,1521.35 2105.43,1435.57 2213.5,1327.5 2290.45,1250.55 L1.1
NetJ5_1: J5.1 JP10.1 Q10.1 S1.2 | length 1714.2
  Top Layer w40: JP10.1 1165,735 1371,941 v3(1593.31,941) 1618.31,916 1700,916 1746,870 1979,870 2000,891 S1.2
  Bottom Layer w10: v3@1593.31,926 v3(1593.31,941)
  Bottom Layer w30: J5.1 1551.05,968.26 v3@1593.31,926 ; v3(1593.31,941) 1623.31,911 1871.97,911 Q10.1@1876.97,916
NetJ5_2: J5.2 Q10.3 | length 624.3
  Bottom Layer w30: J5.2 1487.63,1007.63 1646,1166 1826.97,1166 Q10.3@1876.97,1116
NetLED1_1: LED1.1 R51.2 | length 147.9
  Top Layer w10: R51.2 941,2711 LED1.1
NetLED1_2: LED1.2 Q2.LED | length 130.4
  Top Layer w10: Q2.LED 879.8,2896.2 905,2871 LED1.2
NetLED2_1: LED2.1 R14.2 | length 102
  Top Layer w10: R14.2 LED2.1@1473,2723
NetLED3_1: LED3.1 R15.2 | length 104
  Top Layer w10: R15.2 LED3.1@1475,2830
NetLED4_1: LED4.1 R16.2 | length 109
  Top Layer w10: R16.2 LED4.1
NetLED5_1: LED5.1 R17.2 | length 107
  Top Layer w10: R17.2 LED5.1@1475,3042
NetLED6_1: LED6.1 R18.2 | length 106
  Top Layer w10: R18.2 LED6.1@1474,3130
NetLED7_1: LED7.1 R19.2 | length 107
  Top Layer w10: R19.2 LED7.1@1477,3220
NetLED8_1: LED8.1 R20.2 | length 101
  Top Layer w10: R20.2 LED8.1
NetLED9_1: LED9.1 R21.2 | length 100
  Top Layer w10: R21.2 LED9.1@1467,3400
NetLED10_1: LED10.1 R13.2 | length 122
  Top Layer w20: LED10.1@2587,1796 R13.2
NetQ2_8: Q2.KEY R50.2 | length 128.6
  Top Layer w10: Q2.KEY 913.31,3014.31 R50.2
PWMA: A.15 A.23 Q0.PA4 | length 460.6
  Top Layer w10: v1(1244,1775) 1247.18,1771.82 1358.44,1771.82 Q0.PA4
  Bottom Layer w10: A.15 1196.69,1589.69 1248,1641 1248,1765 1218.59,1794.41 A.23
PWMB: B.15 B.23 Q0.PA6 | length 1531.9
  Top Layer w10: Q0.PA6 1450.41,1810.41 1600,1960 1600,2199 1550,2249 v1@1550,2270.5
  Bottom Layer w10: 1161.53,2002.37 1183.83,2002.37 1226.35,2044.89 1226.35,2150.56 1183.19,2193.73 1161.53,2193.73 B.23 1153.94,2201.32 1132.74,2201.32 1119.35,2214.71 1119.35,2302.35 1142.05,2325.05 1221.84,2325.05 1246.89,2300 1285.12,2300 1286.12,2301 1319.09,2301 1349.59,2270.5 1393.04,2270.5 1406.54,2257 1462.4,2257 1472.4,2247 1495.6,2247 1512,2263.4 1512,2270.5 v1(1551.5,2270.5)
RESET: C62.1 Q0.NRST R42.1 | length 294.5
  Top Layer w10: Q0.NRST 1103.32,1508.68 C62.1@1145,1467 ; C62.1@1143,1462 R42.1
SCL: Q0.PB6 Q11.2 R67.2 | length 848.9
  Top Layer w10: v1(424,2013) v1@533,2013 ; v1(450,1856) 459.04,1856 477.89,1837.15 491.35,1837.15 Q11.2 ; 499,2014 R67.2 ; v1(818,1866) 853.91,1830.09 Q0.PB6
  Bottom Layer w10: v1(424,2013) 449.96,1987.04 v1@449.96,1857.04 ; v1(535,2015) 610.33,2015 771.33,1854 806,1854 v1(818,1866)
SDA: Q0.PB7 Q11.3 R66.2 | length 822.7
  Top Layer w8: v1(753,1935) 753,1884 829,1808 877.24,1808 877.87,1808.63 904.68,1808.63 Q0.PB7
  Top Layer w10: Q11.3 602.04,1857.04 669,1924 669,1973 R66.2@586,2056
  Bottom Layer w10: v1(590,2065) 599,2065 729,1935 v1(753,1935) v1@755,1937
SHARP1: D1.3 Q0.PC6 | length 2452.2
  Top Layer w8: v1(512,2620) 525,2633 774,2633 877,2530 913,2530 958,2575 958,2737 978,2757 1002,2757 1028,2731 1028,2654 1245,2437 1245,2178.5 1202,2135.5 1202,2111
  Bottom Layer w8: D1.3 206.45,3241.55 232,3216 294,3216 322,3188 322,3165 233,3076 233,2899 v1(512,2620)
SHARP2: D2.3 Q0.PC7 | length 2594
  Top Layer w10: v1(249,1371) 276,1344 v1(276,548) ; v1(1081,1842) 1182.06,1943.06 Q0.PC7
  Bottom Layer w10: D2.3 259.55,531.55 v1(276,548) ; v1(249,1371) 495,1371 544,1420 544,1753 610,1819 653.6,1819 731.6,1741 980,1741 981,1742 994.97,1742 1071,1818.03 1071,1832 v1(1081,1842)
SHARP3: D3.3 Q0.PC8 | length 1561.4
  Top Layer w10: v1(994,2717) 994,2660 1228,2426 1228,2185.54 1163.15,2120.69 1163.15,2086.78 Q0.PC8
  Bottom Layer w10: D3.3 723,3323.39 723,2988 v1(994,2717)
SHARP4: D4.3 Q0.PC9 | length 2832.8
  Top Layer w10: v1@307,1405 307,736 374,669 590,669 v1(617,696) ; v1(1078,1902) 1142.69,1966.69 Q0.PC9
  Bottom Layer w10: v1(307,1411) 436,1411 517,1492 517,1765 588,1836 601.54,1836 602.54,1837 661.05,1837 738.05,1760 987.51,1760 1053,1825.49 1053,1853.6 1078,1878.6 v1(1078,1902)
  Bottom Layer w20: v1(617,696) 617,625 729,513 729,460.39 D4.3
SHARP5: D5.3 Q0.PA8 | length 1409
  Top Layer w10: v1(986,2620) 1008.54,2620 1210,2418.54 1210,2201.23 1123.78,2115.01 1123.78,2110.56 Q0.PA8@1122.22,2109 ; v1(1150,2800) 1182,2832 v1(1182,2959)
  Bottom Layer w10: v1(986,2620) 999,2620 1150,2771 v1(1150,2800) ; v1(1182,2959) 1198,2975 D5.3
SHARP6: D6.3 Q0.PA9 | length 4061.8
  Top Layer w10: v1(199,1443) 199,1356 238,1317 238,264 409,93 v1(934,93) ; v1(1074,1955) 1103.32,1984.32 Q0.PA9
  Bottom Layer w10: v1(199,1443) 203,1447 422,1447 496,1521 496,1765 ; 493.77,1767.23 580.54,1854 594.09,1854 595.09,1855 668.51,1855 741.51,1782 973,1782 988,1797 999.05,1797 1026,1823.95 1026,1835 1035,1844 1035,1861.05 1050,1876.05 1050,1913.6 1074,1937.6 v1(1074,1955) ; v1(934,93) 1048,207 1184,207 1231,254 1231,361 1205,387 D6.3
SHARP7: D7.3 Q0.PA10 | length 2998.5
  Top Layer w8: v1(1071,2003) 1083.63,2015.63 Q0.PA10 ; v1(1168,1881) 1269,1881 v1(1280,1892) ; v1(1674,1824) 1733,1883 1799,1883 1843,1927 v1@1843,2037
  Bottom Layer w8: v1@1070,2002 v1(1071,2003) 1088,2003 1104,1987 1104,1928 1151,1881 v1(1168,1881) ; v1(1280,1892) 1330,1842 1388.75,1842 1390.75,1844 1615.75,1844 1635.75,1824 v1(1674,1824) ; v1@1842,2046 1883,2005 1883,1944 1944,1883 2249,1883 2349,1783 2426.06,1783 2446.88,1762.18 2497.42,1762.18 2524.7,1734.9 2619.1,1734.9 2640,1714 2657,1731 2657,1804 2545,1916 2345,1916 2297,1964 2297,2107 2370.08,2180.08 D7.3
  other v1: 1843,2045
SHARP8: D8.3 Q0.PA11 | length 2420.7
  Top Layer w10: v1(980,2441) 980,2217.46 1063.17,2134.29 Q0.PA11@1063.17,2086.78
  Bottom Layer w10: v1(980,2441) 982,2443 1234,2443 1282,2395 1388.6,2395 1389.6,2396 1547,2396 1762,2181 1762,1907 1791,1878 1860,1878 2034,1704 2329,1704 2442.01,1590.99 D8.3
START: P1.3 Q0.PA12 | length 753.5
  Top Layer w10: v1(791,2018) 807,2018 837,2048 1038,2048 1044.26,2054.26 Q0.PA12
  Bottom Layer w10: P1.3 657,2152 v1(791,2018)
SW1: Q0.PC13 S2.2 | length 1761.8
  Top Layer w8: 682,649 685,652 685,692.18 682,695.18 682,912.73 701,931.73 701,982.27 600,1083.27 600,1424.33 688.28,1512.62 828.67,1512.62 889.05,1573 991,1573 1004.89,1586.89 Q0.PC13
  Top Layer w10: S2.2 442,409 682,649
SW2: Q0.PC14/OSC32_IN S3.2 | length 1724.4
  Top Layer w8: v1(684,605) 684,626.96 701,643.96 701,909.11 717,925.11 717,988.89 616,1089.89 616,1417.7 694.91,1496.62 835.3,1496.62 895.68,1557 997.63,1557 1022.8,1582.17 1022.8,1631.46 Q0.PC14/OSC32_IN
  Top Layer w10: v1(770,507) 770,445 822,393 S3.2
  Bottom Layer w10: v1(684,605) 770,519 v1(770,507)
T_SWO: JP1.6 Q0.PB3 | length 3483.6
  Top Layer w10: v1(390,983) 390,1004.4 406,1020.4 406,1043.6 396,1053.6 396,1416.46 236,1576.46 236,2292 338.53,2394.53 447.47,2394.53 659,2183 v1(659,2073) ; v1(837,1945) 869.84,1912.16 869.84,1897.54 877.46,1889.93 905.69,1889.93 Q0.PB3 ; v1(843,575) 1072,575 1141,644 JP1.6 JP1.6@1256,644
  Bottom Layer w10: v1(390,983) 459.88,983 773,669.88 773,604.4 791.4,586 832,586 v1(843,575) ; v1(659,2073) 697,2073 763,2007 763,2006.4 824.4,1945 v1(837,1945)
TRST: JP1.5 Q0.PB4 | length 3658.4
  Top Layer w10: v1(378,1032) 378,1409 218,1569 218,2310 320.53,2412.53 461.47,2412.53 710,2164 710,2034 v1@699,2023 ; v1(801,1912) 823,1912 865.54,1869.46 Q0.PB4 ; v1(803,614) 810,621 1083,621 1156,694 JP1.5
  Bottom Layer w10: v1(378,1032) 436.33,1032 803,665.33 v1(803,614) ; v1@710,2020 801,1929 v1(801,1912)
  other v1: 700,2026
USART1_RX: Q0.PC5 Q2.UART_TXD | length 3163
  Top Layer w10: Q2.UART_TXD 387.5,3565 836,3565 879,3522 879,3207.27 878.32,3206.59 878.32,3191.68 991,3079 991,3004 1012,2983 1012,2846.46 1293.46,2565 1297.05,2565 1352,2510.05 1352,2450.54 1377,2425.54 v1(1377,2423) ; Q0.PC5@1360,1870.24 1388.23,1870.24 1401.98,1884 v1(1416,1884) ; v1(1585,1904) 1599,1918 1761,1918 1797,1954 1797,2200 v1(1765,2232)
  Bottom Layer w10: v1@1372,2423 1574,2423 v1(1765,2232) ; v1(1416,1884) 1434,1902 1583,1902 v1(1585,1904)
USART1_TX: Q0.PC4 Q2.UART_RXD | length 3395
  Top Layer w10: Q2.UART_RXD@291.4,3427.69 252,3467.09 252,3497.09 337.91,3583 843.46,3583 897,3529.46 897,3198.46 1009,3086.46 1009,3011.46 1030,2990.46 1030,2853.91 1300.91,2583 1304.51,2583 1376,2511.51 1376,2452 1377,2451 v1(1410,2451) ; Q0.PC4 1438.78,1849.78 v1(1462,1873) ; v1(1631,1878) 1653,1900 1777,1900 1815,1938 v1(1815,2240)
  Bottom Layer w10: v1@1410,2449 1606,2449 v1(1815,2240) ; v1(1462,1873) 1472,1863 1616,1863 v1(1631,1878)
VBAT: A.13 A.14 A.24 B.13 B.14 B.24 C12.1 C13.1 C16.1 C17.1 C30.1 Q7.1 S1.1 | length 3016
  Top Layer w40: v1(1042,2273) 1160,2273 v1(1172,2285) ; C30.1@1865,1497 2014.15,1497 Q7.1@2019,1501.85 ; Q7.1 2027,1509.85 2027,1066 2046,1047 2046,1031.16 2098.43,978.74 S1.1
  Top Layer w55: v2@1589,1420 1788,1420 C30.1@1865,1497
  Bottom Layer w40: C16.1 C17.1@1019,2273 ; C13.1 1142,1420 1154.85,1432.85 A.13 ; 1154.85,1957 1159.63,1961.78 1221.78,1961.78 ; 1167.68,1828.32 1221,1828.32 ; v1@1170,2287 v1(1172,2285) 1172,2234.32 1223.68,2234.32 1280,2178 1280,2020 1221.78,1961.78 ; 1281.68,1828.32 1221,1828.32 ; 1221,1828.32 1221,1961 1221.78,1961.78
  Bottom Layer w55: A.13 1247.5,1538.5 1253.5,1544.5 ; 1281.68,1828.32 1297,1813 1297,1572 1269.5,1544.5 1253.5,1544.5 ; v2(1582,1420) 1538.42,1420 1467.41,1491 1435.41,1491 1431.92,1494.5 1303.5,1494.5 1253.5,1544.5
VCC: A.19 A.20 B.19 B.20 C1.1 C2.1 C3.1 C4.1 C7.1 C10.1 C11.1 C14.1 C15.1 C32.1 C71.1 C72.1 CEWKA.2 D21.2 J3.1 J4.1 JP1.1 LED2.2 LED3.2 LED4.2 LED5.2 LED6.2 LED7.2 LED8.2 LED9.2 Q0.VBAT Q0.VDD_1 Q0.VDD_2 Q0.VDD_3 Q0.VDD_4 Q2.3V3 Q8.OUT Q11.1 Q11.4 Q11.5 Q11.15 Q11.16 R42.2 R66.1 R67.1 | length 12727.3
  Top Layer w10: Q11.15 Q11.16 ; Q11.5 482.91,1916.09 497.06,1901.94 Q11.4 494.65,1885.04 438.36,1885.04 436.66,1883.34 432.34,1883.34 413,1864 413,1836 443.14,1805.86 Q11.1 497.06,1804.06 471,1778 ; R67.1 R66.1 586,2135.38 624,2097.38 624,2057 687.4,1993.6 688.4,1993.6 703.5,1978.5 ; Q0.VDD_1 Q0.VBAT ; Q0.VDD_4 1359.87,1752 1391.63,1752 ; LED3.2@1555,2831 LED3.2@1557,2829
  Top Layer w15: Q11.16@467.62,1765.41 462.61,1760.39 C71.1 C72.1 661,1745 745,1745 791,1699 C7.1 ; 703.5,1745 703.5,1978.5 711.63,1978.5 738,2004.87 738,2042 836,2140 v1@836,2145 ; C1.1@791,1591 C7.1 ; 895,1705 895,1703 871,1679 C7.1 ; R42.2@1243,1387 1243,1267 1317.57,1192.43 1461,1192.43 1461,1457 1462,1457 1708,1703 1708,1760 ; Q0.VDD_2@1359.22,2008.98 1358,2010.2 1358,2062 ; 1391.63,1752 1434,1752 1475,1711 C4.1 1527,1760 1708,1760 ; C3.1 1358,2062 ; 1882,2391 1882,1933 1760,1811 1759,1811 1708,1760 ; Q8.OUT 2067.43,2391 1453,2391 1358,2296 1358,2062
  Top Layer w20: v1@836,2447 836,2145 866,2115 C2.1 951.98,2115 975,2091.98
  Top Layer w25: Q2.3V3 355.14,2837.14 405,2887 v1(405,2961) ; v1(399,739) 617,957 v1(640,957) ; v1(642,1791) 642,1764 661,1745 ; JP1.1 v1(1529,494)
  Top Layer w30: Q2.3V3 262.14,2837.14 238,2813 238,2735 275,2698 275,2574.8 403.8,2446 835,2446 v1@836,2447 ; v1(1494,2505) 1557,2568 1557,2829 LED4.2 LED9.2@1557,3402 ; 1557,2620 2039,2620 2065,2594 C32.1 2075,2455.46 Q8.OUT@2085.23,2445.23
  Bottom Layer w20: 642,1557 911,1557 C10.1 1064,1596 C11.1 1065,1673 1099,1707 1154,1707 ; v1(837,2141) 931,2141 964,2108 1154,2108
  Bottom Layer w25: J4.1 348.48,739 v1(399,739) ; J3.1 405,3013.52 v1(405,2961) ; v1(642,1791) 642,951 840,753 1384,753 1529,608 v1(1529,494)
  Bottom Layer w30: v1(834,2449) 865,2480 1385.26,2480 1394.26,2489 1458,2489 1464,2495 1484,2495 v1(1494,2505)
pads on no net: J1.NC J2.NC J3.NC J4.NC J5.NC Q0.PA3 Q0.PB0 Q0.PB1 Q0.PB8 Q0.PB9 Q0.PC11 Q0.PC15/OSC32_OUT Q0.PD2 Q0.PF4 Q2.3 Q2.4 Q2.5 Q2.6 Q2.7 Q2.8 Q2.9 Q2.10 Q2.11 Q2.14 Q2.15 Q2.16 Q2.17 Q2.18 Q2.19 Q2.20 Q2.23 Q2.25 Q2.27 Q2.28 Q2.29 Q2.30 Q2.31 Q2.32 Q2.33 Q2.34 S1.3 S2.1 S3.1

## Polygon pours and split planes (outlines as drawn)
GND on Bottom Layer "Top Layer-No Net" (solid, shelved, pour order 6): 0,3781 1,3780 1102,3780 1102,3638 1331,3544 1672,3545 1674,3543 1674,3032 2754,3032 2755,3031 2755,748 1675,748 1673,746 1673,235 1328,235 1327,234 1104,140 1104,2 1102,0 0,0
GND on Top Layer "Top Layer-No Net" (solid, shelved, pour order 4): 0,3780 1102,3780 1102,3635 1336,3543 1673,3544 1673,3032 2755,3032 2755,748 1675,748 1673,746 1673,235 1330,235 1329,236 1329,235 1103,142 1103,1 1102,0 1101,1 0,1
GND on Bottom Layer "Top Layer-No Net" (solid, pour order 12): 8,3773 10,3771 265,3771 265,2669 282,2652 291,2643 876,2643 876,3773 875,3774 880,3769 1093,3769 1093,3642 1103,3632 1196,3539 1359,3539 1672,3539 1673,3540 1669,3536 1669,3024 2739,3024 2745,3030 2747,3028 2747,755 1668,755 1667,754 1663,750 1663,241 1329,241 1327,243 1240,156 1098,156 1098,10 1093,5 1085,13 9,13 9,3771 11,3773
M_OUT2A on Bottom Layer "Top Layer-No Net" (solid, pour order 21): 1436,1723 1437,1722 1482,1722 1586,1722 1602,1706 1608,1700 1641,1700 1705,1700 1706,1699 1706,1639 1641,1639 1640,1638 1638,1636 1470,1636 1441,1636 1439,1638
M_OUT1A on Bottom Layer "Top Layer-No Net" (solid, pour order 19): 1443,1827 1570,1827 1594,1827 1645,1776 1648,1779 1702,1779 1702,1722 1700,1720 1697,1717 1654,1717 1612,1717 1554,1775 1539,1790 1481,1790 1440,1790 1439,1791
M_OUT2B on Bottom Layer "Top Layer-No Net" (solid, remove dead copper, pour order 8): 1705,2043 1644,2043 1641,2046 1580,2107 1559,2107 1501,2107 1495,2113 1479,2129 1477,2129 1438,2129 1437,2128 1437,2041 1502,2041 1504,2039 1524,2019 1594,2019 1595,2019 1633,1981 1634,1982 1705,1982
M_OUT1B on Bottom Layer "Top Layer-No Net" (solid, pour order 6): 1468,2230 1578,2230 1579,2229 1673,2135 1673,2133 1698,2133 1705,2126 1703,2124 1703,2064 1643,2064 1641,2062 1576,2127 1555,2127 1555,2168 1553,2170 1535,2188 1509,2188 1447,2188 1440,2195 1437,2198 1437,2227
GND on Top Layer "Top Layer-No Net" (solid, pour order 10): 8,3764 12,3768 261,3768 261,2674 268,2667 294,2641 878,2641 878,3759 869,3768 1102,3768 1102,3635.6 1103,3634.6 1193.6,3544 1342,3544 1661,3544 1675,3530 1675,3032 2743,3032 2747,3028 2755,3020 2755,749 1676,749 1670,743 1670,246 1349,246 1341,238 1247,144 1096,144 1096,19 1102,13 5,13 5,3758 11,3764

## Keep-outs
Keep-Out Layer:
  lines w5: 0,0 0,3780 ; 0,0 1102,0 ; 0,0 0,3780 ; 0,0 1102,0 ; 0,3780 1102,3780 ; 0,3780 1102,3780 ; 1102,0 1102,145 ; 1102,0 1102,145 ; 1102,145 1330,236 ; 1102,145 1330,236 ; 1102,3635 1102,3780 ; 1102,3635 1330,3544 ; 1102,3635 1102,3780 ; 1102,3635 1330,3544 ; 1330,236 1673,236 ; 1330,236 1673,236 ; 1330,3544 1673,3544 ; 1330,3544 1673,3544 ; 1673,236 1673,748 ; 1673,236 1673,748 ; 1673,748 2755,748 ; 1673,748 2755,748 ; 1673,3032 2755,3032 ; 1673,3032 1673,3544 ; 1673,3032 1673,3544 ; 1673,3032 2755,3032 ; 2755,748 2755,3032 ; 2755,748 2755,3032

## Other copper
Top Layer:
  pour cut-out: 886,1455 886,1114 712,1114 712,1455
Bottom Layer:
  pour cut-out: 713,1503 712,1455 886,1455 886,1114 794,1116 712,1114